# Altium PCB UEEE_READ_FRID_V1.1.PcbDoc
Units mm, origin at the board's own origin, x right, y up, seen from the top; angles counter-clockwise.
Board outline 70 x 88.95 mm, 2 copper layers (Top Layer, Bottom Layer); 71 components, 43 nets, 226 pads, 155 vias.
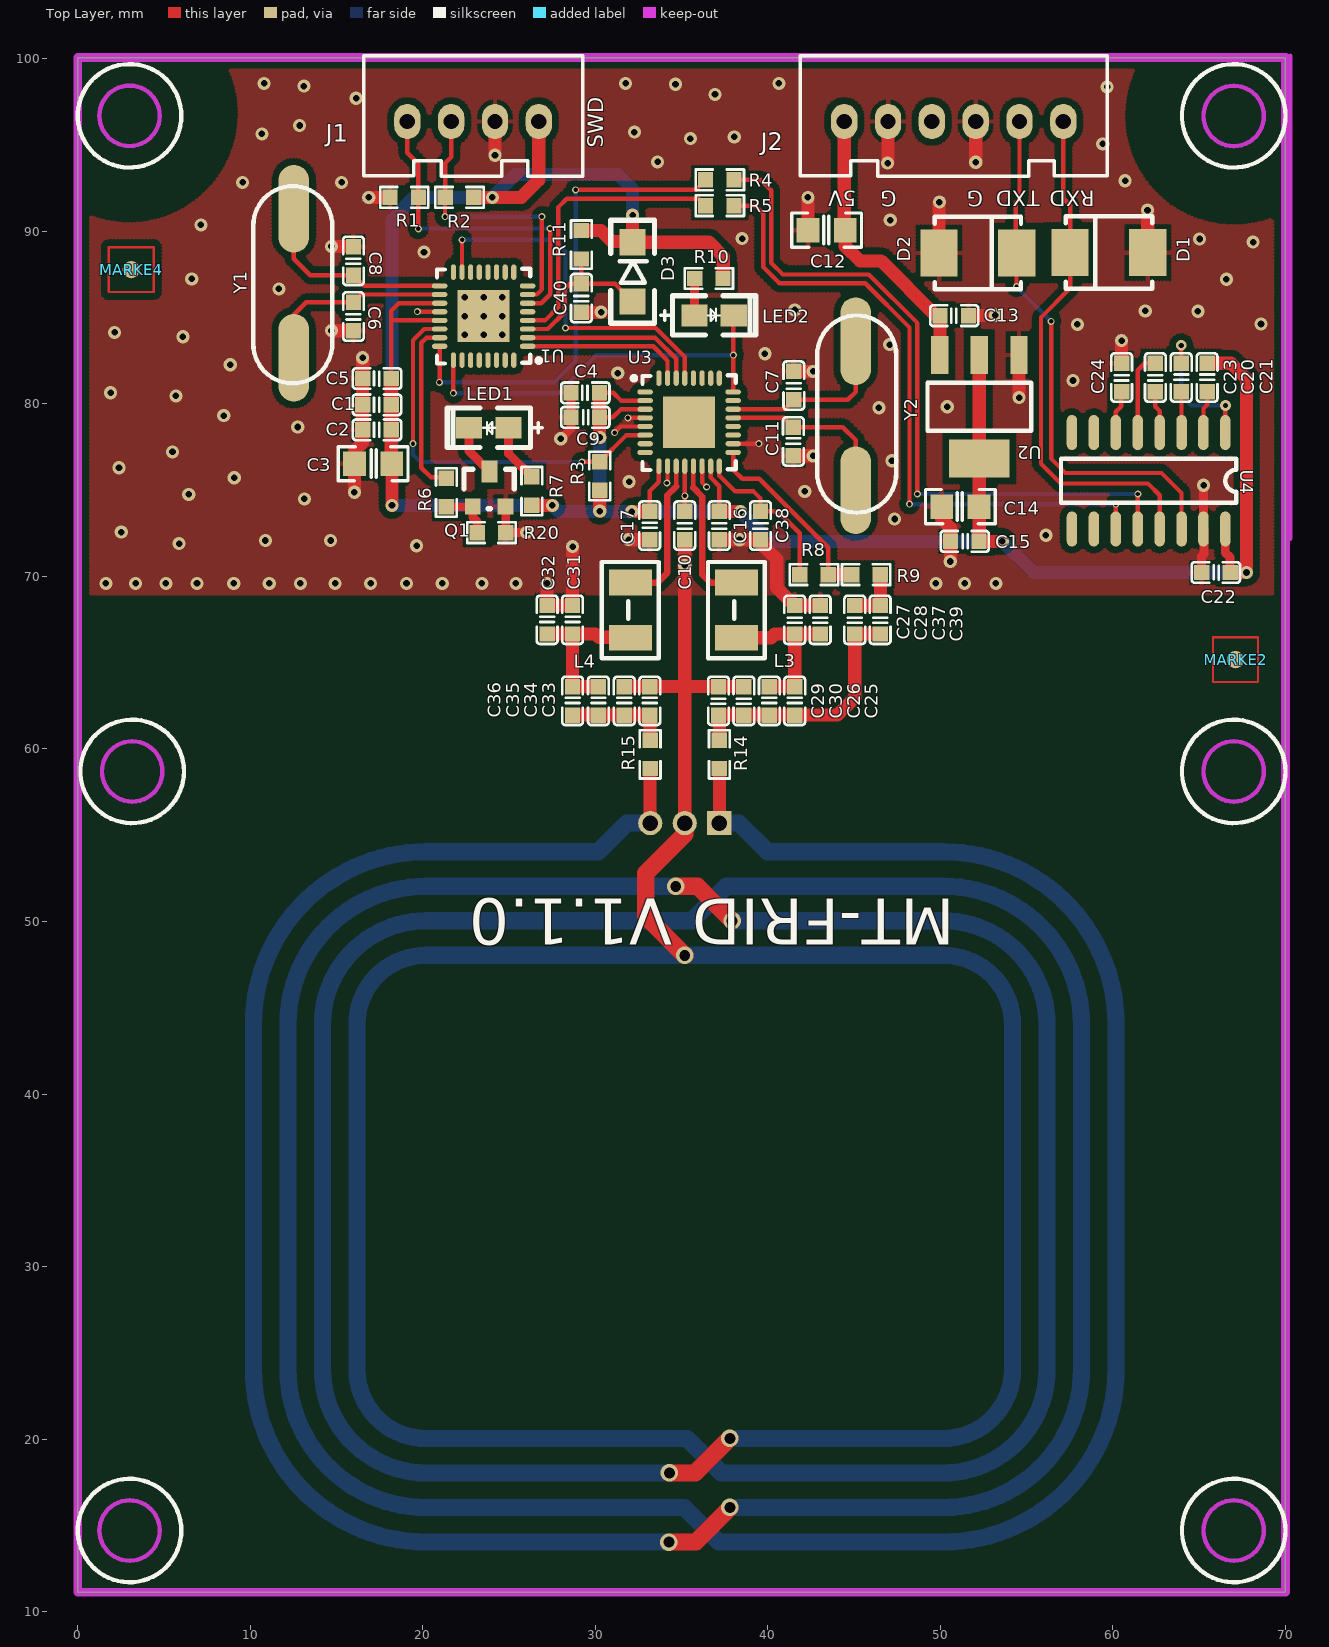
[diagram p0: Top Layer view]
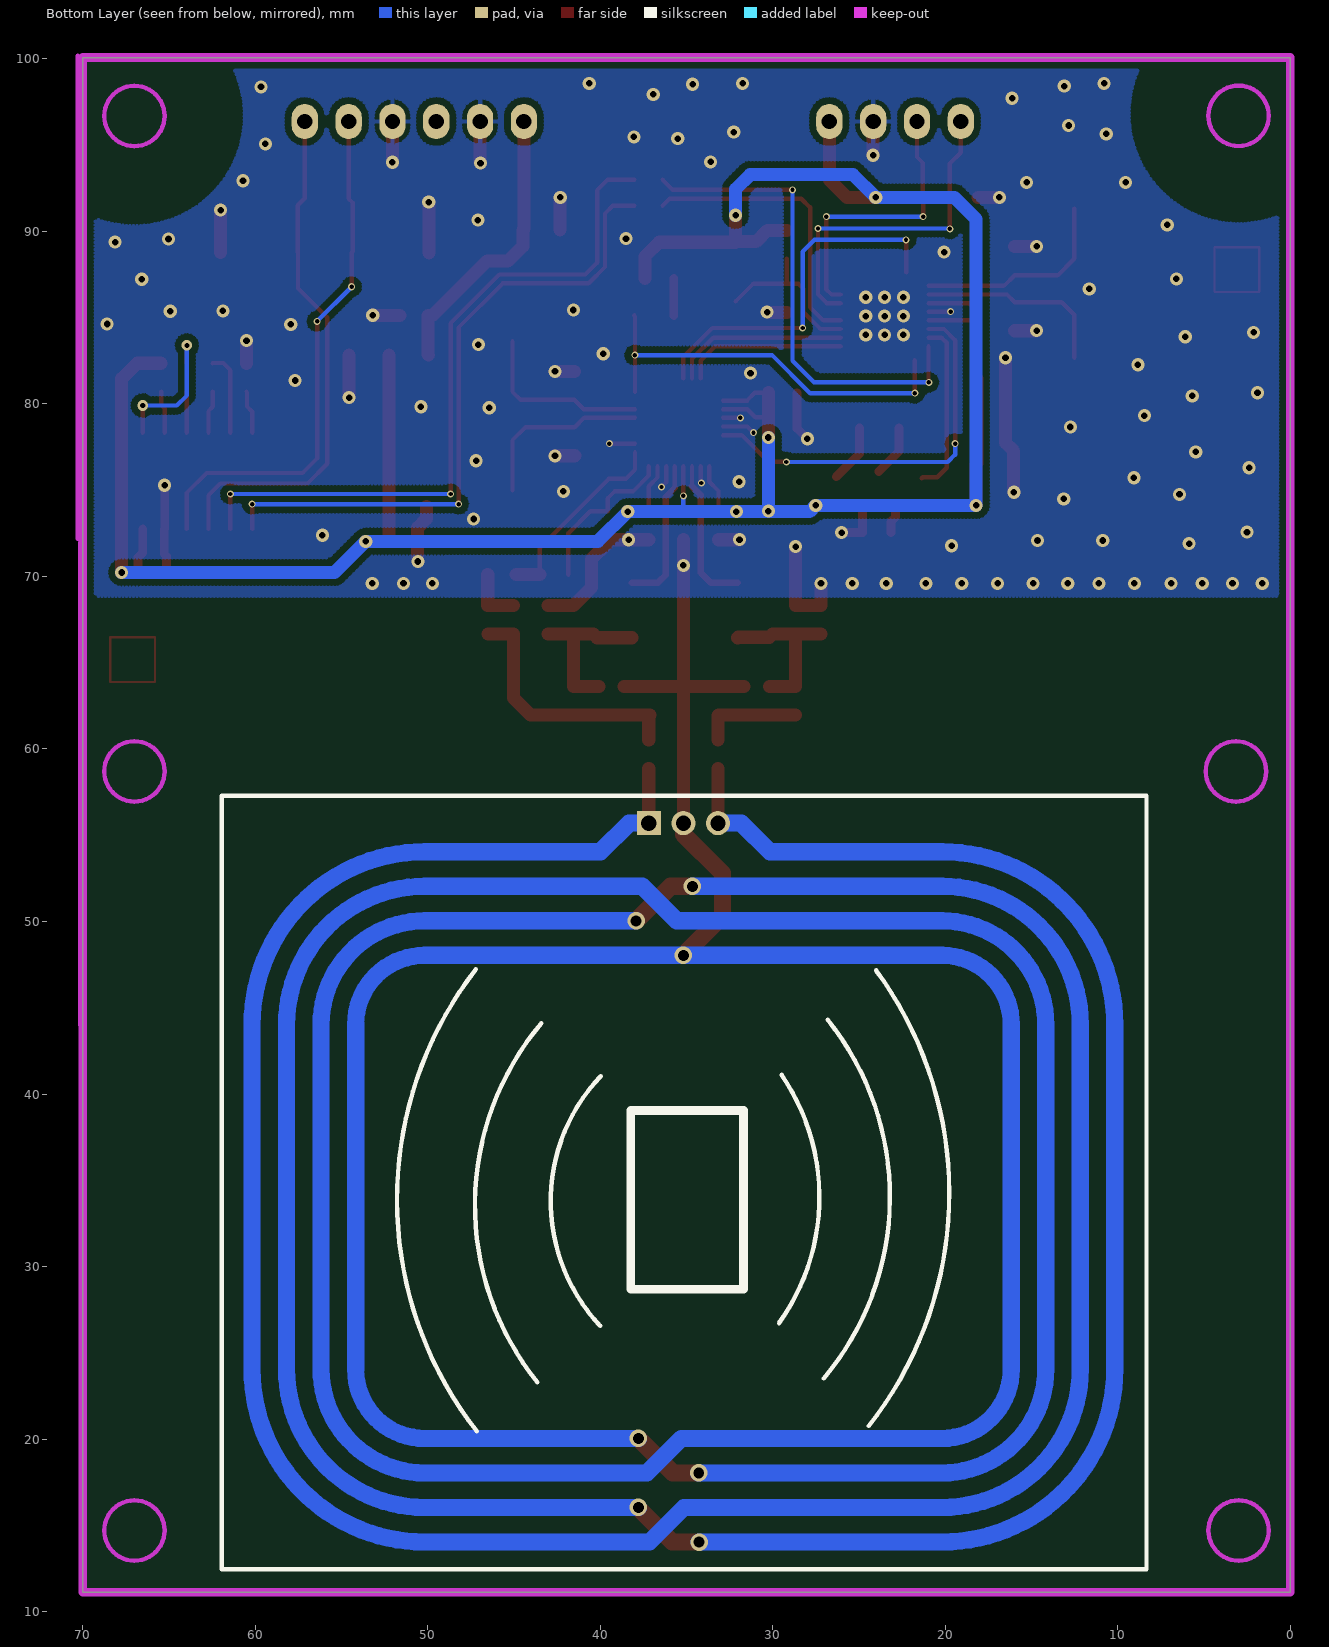
[diagram p1: Bottom Layer view, seen from below]

## Layer stack, top to bottom
Top Layer: signal copper 0.0356
Dielectric: dielectric 0.32, FR-4, Dk 4.8
Bottom Layer: signal copper 0.0356

## Board outline
0,11.125 70,11.125 70,100.076 0,100.076

## Design rules (kind name [scope] priority, off if disabled: settings)
AssemblyTestPointUsage [All] p1 off:
AssemblyTestpoint [All] p1 off: testpointundercomponent=TRUE minsize=1.016 maxsize=2.54 preferedsize=1.524 minholesize=0 maxholesize=1.016 preferedholesize=0.813 testpointgrid=0.025 usegrid=TRUE gridtolerance=0 allowsidetop=TRUE allowsidebottom=TRUE
Clearance Clearance_1 [InPolygon] p1: gap=0.381
Clearance [All] p2: gap=0.127
ComponentClearance [All] p1 off: gap=0.254 collisioncheckmode=3 verticalgap=0.254 showdistances=FALSE
FabricationTestPointUsage [All] p1 off: valid=0 allowmultiple=FALSE
FabricationTestpoint [All] p1 off: side=3 testpointundercomponent=TRUE minsize=1.016 maxsize=2.54 preferedsize=1.524 minholesize=0 maxholesize=1.016 preferedholesize=0.813 testpointgrid=0.025 allowsidetop=TRUE allowsidebottom=TRUE usegrid=TRUE gridtolerance=0
Height [All] p1 off: minheight=0 maxheight=25.4 prefheight=12.7
HoleSize [All] p1 off: absolutevalues=TRUE maxlimit=2.54 minlimit=0.025 maxpercent=80.000 minpercent=20.000
HoleToHoleClearance [All] p1 off: gap=0.025 allowstackedmicrovias=TRUE
LayerPairs [All] p1 off: enforce=TRUE
MinimumSolderMaskSliver [All] p1 off: minsoldermaskwidth=0.025
NetAntennae NetAntennae_2 [InNet('RX1')] p1 off: netantennaetolerance=2539.975
NetAntennae NetAntennae_1 [InNet('Net_3')] p2 off: netantennaetolerance=2539.975
NetAntennae [All] p3 off: netantennaetolerance=0
PolygonConnect PolygonConnect_1 [IsVia] p1: connectstyle=Direct reliefconductorwidth=0.254 reliefentries=4 polygonreliefangle="90 Angle" airgapwidth=0.254
PolygonConnect [All] p2: connectstyle=Relief reliefconductorwidth=0.254 reliefentries=4 polygonreliefangle="90 Angle" airgapwidth=0.254
RoutingVias [All] p1: holewidth=0.305 width=0.61 viastyle="Through Hole" minholewidth=0.254 minwidth=0.406 maxholewidth=0.711 maxwidth=1.27
SilkToSilkClearance [All] p1 off: silktosilkclearance=0.025
SilkToSolderMaskClearance [IsPad] p1 off: minsilkscreentomaskgap=0.025 clearancetoexposedcopper=TRUE
SolderMaskExpansion [All] p1: expansion=0.102
Width Width_1 [InNet('VCC_3V3')] p1: maxlimit=1.27 minlimit=0.254 preferedwidth=0.508
Width Width_2 [InNet('DGND')] p2: maxlimit=1.27 minlimit=0.254 preferedwidth=0.508
Width [All] p3: maxlimit=1.27 minlimit=0.127 preferedwidth=0.254
15 further rules are at their usual default settings.

## Components (designator, comment, footprint, x,y, rotation, side; value= is the part's Value field where it differs from the comment)
C1 "0.1uF" 0603C 17.345,79.946 r180 top
C2 "0.1uF" 0603C 17.345,78.499 r180 top
C3 "10uF" 0805C 18.183,76.517 r180 top
C4 "0.1uF" 0603C 29.417,80.645 r180 top
C5 "0.1uF" 0603C 17.345,81.47 r180 top
C6 "22pF" 0603C 15.977,85.065 r270 top
C7 "15pF" 0603C 41.504,81.064 r270 top
C8 "22pF" 0603C 15.977,88.29 r270 top
C9 "0.1uF" 0603C 29.417,79.223 r0 top
C10 "0.1uF" 0603C 35.179,72.949 r270 top
C11 "15pF" 0603C 41.478,77.826 r90 top
C12 "10uF" 0805C 42.342,90.094 r0 top
C13 "10nF" 0603C 50.8,85.115 r180 top
C14 "4.7uF" 0805C 50.089,74.066 r0 top
C15 "10nF" 0603C 51.41,72.034 r0 top
C16 "0.1uF" 0603C 37.186,72.949 r270 top
C17 "0.1uF" 0603C 33.147,72.949 r90 top
C20 "1uF" 0603C 63.957,81.534 r90 top
C21 "0.1uF" 0603C 65.456,81.534 r90 top
C22 "1uF" 0603C 65.964,70.231 r0 top
C23 "0.1uF" 0603C 62.459,81.534 r270 top
C24 "0.1uF" 0603C 60.503,81.534 r270 top
C25 "X" 0603C 41.554,62.789 r90 top
C26 "20pF" 0603C 40.081,62.789 r90 top
C27 "82pF" 0603C 41.554,67.488 r270 top
C28 "X" 0603C 43.028,67.488 r270 top
C29 "47pF" 0603C 37.135,62.789 r270 top
C30 "10pF" 0603C 38.608,62.789 r270 top
C31 "82pF" 0603C 28.677,67.488 r90 top
C32 "X" 0603C 27.203,67.488 r90 top
C33 "47pF" 0603C 33.152,62.789 r90 top
C34 "10pF" 0603C 31.674,62.789 r90 top
C35 "20pF" 0603C 30.175,62.789 r90 top
C36 "X" 0603C 28.677,62.789 r90 top
C37 "27pF" 0603C 45.034,67.488 r270 top
C38 "0.1uF" 0603C 39.573,72.949 r270 top
C39 "X" 0603C 46.507,67.488 r270 top
C40 "1uF" 0603C 29.185,86.131 r270 top
D1 "SMBJ15CA" SMB（DO-214AA） 59.766,88.773 r0 top
D2 "SMBJ15CA" SMB（DO-214AA） 52.172,88.748 r180 top
D3 "1N4148" 1206D 32.156,87.655 r90 top
J1 "DIP-4_2.54MM" CON-DIP4-2.54mm 22.911,96.368 r0 top
J2 "DIP-6_2.54MM" CON06_2.54 44.425,96.368 r0 top
L3 "560nH/1uH" "3225 [1210 inch]" 38.176,68.047 r270 top
L4 "560nH/1uH" "3225 [1210 inch]" 32.029,68.047 r270 top
LED1 "GREEN" D0805 24.968,78.613 r270 top
LED2 "GREEN" D0805 35.738,85.141 r90 top
MARKE2 "MARK1.0" MARK1.0 67.107,65.176 r90 top
MARKE4 "MARK1.0" MARK1.0 3.099,87.782 r90 top
Q1 "8050" SOT23 22.902,74.04 r0 top
R1 "10K" 0603R 18.923,91.973 r180 top
R2 "10K" 0603R 22.123,91.973 r180 top
R3 "10K" 0603R 30.251,75.819 r270 top
R4 "0R" 0603R 37.211,92.989 r0 top
R5 "0R" 0603R 37.211,91.491 r0 top
R6 "10K" 0603R 21.364,74.871 r270 top
R7 "1.5K" 0603R 26.317,74.947 r270 top
R8 "1K" 0603R 42.672,70.104 r0 top
R9 "1.5K" 0603R 45.695,70.104 r0 top
R10 "1.5K" 0603R 36.576,87.274 r180 top
R11 "1.5K" 0603R 29.185,89.23 r90 top
R14 "1R" 0603R 37.186,59.69 r270 top
R15 "1R" 0603R 33.172,59.69 r270 top
R20 "3K" 0603R 23.978,72.542 r180 top
U1 "LPC824M201JHI33" HVQFN-32 23.52,85.09 r90 top
U2 "SPX1117M3-L-3.3V" SOT-223 52.253,79.835 r90 top
U3 "FM17520" QFN-32 35.433,78.943 r0 top
U4 "SP3232" SO-16 66.523,78.334 r270 top
Y1 "12MHZ" ZS_SMD 12.522,91.313 r270 top
Y2 "27.12MHZ" ZS_SMD 45.085,75.006 r90 top
? "13.56MHZ天线" 天线40X50MM 35.179,55.702 r0 bottom

## Footprints (in the part's own frame and the unit in brackets; to place one, negate y for a bottom-side part, rotate by r counter-clockwise, add the part's x,y. Pads: shape width x height; smd on the part's side, far side on the other; paste and mask are expansions set on the pad)
0603C [mil]
  rect 35x35 smd: 1(-32.5,0) 2(32.5,0)
  silkscreen extent -55,-24 55,24
0603R [mil]
  rect 35x35 smd: 1(-32.5,0) 2(32.5,0)
  silkscreen extent -55,-24 55,24
0805C [mil]
  rect 52x56 smd: 1(-0.58,-0.68) 2(84.42,-0.68)
  silkscreen extent -38,-40 121,38
1206D [mil]
  rect 60x60 smd: 1(-67.5,0) 2(67.5,0)
  silkscreen extent -118,-50 117,50
"3225 [1210 inch]" [mm] "3225 [1210 inch]"
  rect 1.5x2.5 smd: 1(-1.6,0) 2(1.6,0)
  silkscreen extent -2.79,-1.65 2.79,1.65
CON06_2.54 [mil]
  oval 60x80 hole 35: 1(0,0) 2(100,0) 3(200,0) 4(300,0) 5(400,0) 6(500,0)
  silkscreen extent -100,-125 600,150
CON-DIP4-2.54mm [mil]
  oval 60x80 hole 35: 1(-150,0) 2(-50,0) 3(50,0) 4(150,0)
  silkscreen extent -250,-125 250,150
D0805 [mil]
  rect 50x60 smd: 1(-0.34,-0.09) 2(-0.34,-90.09)
  silkscreen extent -45,-140 45,77
HVQFN-32 [mm] "HVQFN-32"
  oval 0.3x0.9 smd mask+0.051: 1(-1.75,-2.55) 2(-1.25,-2.55) 3(-0.75,-2.55) 4(-0.25,-2.55) 5(0.25,-2.55) 6(0.75,-2.55) 7(1.25,-2.55) 8(1.75,-2.55) 17(1.75,2.55) 18(1.25,2.55) 19(0.75,2.55) 20(0.25,2.55) 21(-0.25,2.55) 22(-0.75,2.55) 23(-1.25,2.55) 24(-1.75,2.55)
  oval 0.9x0.3 smd mask+0.051: 9(2.55,-1.75) 10(2.55,-1.25) 11(2.55,-0.75) 12(2.55,-0.25) 13(2.55,0.25) 14(2.55,0.75) 15(2.55,1.25) 16(2.55,1.75) 25(-2.55,1.75) 26(-2.55,1.25) 27(-2.55,0.75) 28(-2.55,0.25) 29(-2.55,-0.25) 30(-2.55,-0.75) 31(-2.55,-1.25) 32(-2.55,-1.75)
  rect 3x3 smd mask+0.051: 33(0,0)
  silkscreen extent -2.75,-3.32 2.75,2.7
MARK1.0 [mm]
  round 1 smd mask+0.5: 1(0,0)
  Top Layer lines w0.127: -1.3,1.3 1.3,1.3 1.3,-1.3 -1.3,-1.3 -1.3,1.3
QFN-32 [mm] "QFN-32"
  oval 0.9x0.3 smd: 1(-2.55,1.751) 2(-2.55,1.25) 3(-2.55,0.75) 4(-2.55,0.25) 5(-2.55,-0.25) 6(-2.55,-0.75) 7(-2.55,-1.25) 8(-2.55,-1.75) 17(2.55,-1.75) 18(2.55,-1.25) 19(2.55,-0.75) 20(2.55,-0.25) 21(2.55,0.25) 22(2.55,0.75) 23(2.55,1.25) 24(2.55,1.75)
  oval 0.3x0.9 smd: 9(-1.75,-2.55) 10(-1.25,-2.55) 11(-0.75,-2.55) 12(-0.25,-2.55) 13(0.25,-2.55) 14(0.75,-2.55) 15(1.25,-2.55) 16(1.75,-2.55) 25(1.75,2.55) 26(1.25,2.55) 27(0.75,2.55) 28(0.25,2.55) 29(-0.25,2.55) 30(-0.75,2.55) 31(-1.25,2.55) 32(-1.75,2.55)
  rect 3x3 smd: 33(0,0)
  silkscreen extent -3.32,-2.78 2.7,2.72
SMB（DO-214AA） [mm] "SMB（DO-214AA）"
  rect 2.159x2.743 smd: 1(2.25,0) 2(-2.25,0)
  silkscreen extent -2.5,-2.1 2.5,2.1
SO-16 [mil]
  oval 80x24 smd: 1(-0.2,-0.3) 2(-0.2,-50.3) 3(-0.2,-100.3) 4(-0.2,-150.3) 5(-0.2,-200.3) 6(-0.2,-250.3) 7(-0.2,-300.3) 8(-0.2,-350.3) 9(219.8,-350.3) 10(219.8,-300.3) 11(219.8,-250.3) 12(219.8,-200.3) 13(219.8,-150.3) 14(219.8,-100.3) 15(219.8,-50.3) 16(219.8,-0.3)
  silkscreen extent 60,-375 160,25
SOT23 [mil]
  rect 36x36 smd: 1(-0.49,0.35) 3(74.51,0.35)
  rect 36x50 smd: 2(37.51,80.35)
  silkscreen extent -20,-5 95,85
SOT-223 [mm]
  rect 2.2x1 smd: 1(3,-2.3) 2(3,0) 3(3,2.3)
  rect 2.2x3.5 smd: 2(-3,0)
  silkscreen extent -1.4,-3 1.4,3
ZS_SMD [mil]
  oval 200x70 smd: 1(0,0) 2(340,0)
  silkscreen extent -52,-93 399,88
天线40X50MM [mil] "天线40X50MM"
  rect 55x55 hole 35: 1(78.74,0)
  round 55 hole 35: 2(0,0) 3(-78.74,0)
  Top Layer lines w39.37: -593.44,1561.56 -1.26,1561.56 77.48,1640.3 590.54,1640.3 cw(c590.55,1246.61) 984.25,1246.61 984.25,459.21 cw(c590.55,459.21) 590.55,65.51 189.5,65.5 124,0 78.74,0 ; -590.55,1640.32 ccw(c-590.55,1246.61) -984.25,1246.61 -984.25,459.21 ccw(c-590.55,459.21) -590.55,65.51 -197.5,65.5 -132,0 -78.74,0 ; -590.55,1561.57 ccw(c-590.55,1246.61) -905.51,1246.61 -905.51,459.21 ccw(c-590.55,459.21) -590.55,144.25 -20.5,144.24 ; -590.55,1482.83 ccw(c-590.55,1246.61) -826.77,1246.61 -826.77,459.21 ccw(c-590.55,459.21) -590.55,222.99 15.51,222.98 ; -590.54,1482.82 -35,1482.82 ; -590.55,301.73 cw(c-590.55,459.21) -748.03,459.21 -748.03,1246.61 cw(c-590.55,1246.61) -590.55,1404.09 4.49,1404.08 83.23,1482.82 590.54,1482.82 ; -590.37,1640.5 -36,1640.5 ; -586.12,301.72 0,301.72 590.54,301.72 ; 94.25,144.24 590.54,144.24 ccw(c590.55,459.21) 905.51,459.21 905.51,1246.61 ccw(c590.55,1246.61) 590.55,1561.57 103.01,1561.57 ; 103,1404.08 590.54,1404.08 cw(c590.55,1246.61) 748.03,1246.61 748.03,459.21 cw(c590.55,459.21) 590.55,301.73 ; 108,222.98 590.54,222.98 ccw(c590.55,459.21) 826.77,459.21 826.77,1246.61 ccw(c590.55,1246.61) 590.55,1482.83
  Top Layer lines w40: 15.51,222.98 94.25,144.24
  Bottom Layer lines w39.37: -36,1640.5 25.5,1640.5 103,1563 ; -35,1482.82 24.26,1482.82 103,1404.08 ; -20.5,144.24 26.74,144.24 29.26,144.24 108,222.98 ; 0,301.72 -89,212.72 -89,114.5 0,25.5 0,0
  silkscreen extent -1057,-62 1053,1703

## Part data
C1 C2 C3 C4 C5 C6 C8 C10 C16: library part CAP_3, "Capacitor"
C7 C9 C11 C12 C13 C14 C15 C17 C20 C21 C22 C23 C24 C25 C26 C27 C28 C29 C30 C31 C32 C33 C34 C35 C36 C37 C38 C39 C40: library part CAP, "Capacitor"
D1 D2: library part TVS-D
D3: library part DIODE, "贴片二极管/1N4148/LL34/长电"
J1: library part "4 HEADER", "4 Pin Header"
J2: library part CON6, "Connector"
L3 L4: library part INDUCTOR, "NLV32T-R56J-PF/NLV32T-1R0J-PF"
LED1 LED2: library part LED
MARKE2 MARKE4: library part CON1, "Connector"
Q1: library part NPN
R1 R2 R14 R15: library part RES2
R3 R6 R7 R8 R9 R10 R11 R20: library part RES1
R4 R5: library part RES-1, "RES"
U2: library part LM1117MPX-3.3
U4: library part MAX232ESE
Y1 Y2: library part CRYSTAL

## Via types
v1: diameter 0.762, hole 0.381, Top Layer to Bottom Layer, 121 vias
v2: diameter 0.406, hole 0.254, Top Layer to Bottom Layer, 25 vias
v3: diameter 1.016, hole 0.635, Top Layer to Bottom Layer, 7 vias
v4: diameter 0.61, hole 0.305, Top Layer to Bottom Layer, 2 vias

## Nets (pads, with @x,y where several pads share a name; then routed paths per layer and width w, separated by ;. In a path a pad name is that pad's centre, name@x,y a point inside that pad or via, vN(x,y) a via of type N, cw(c..) or ccw(c..) an arc to the next point about the centre after c; other vN are vias at no path point)
COM_RXD: R4.1 U1.24 | length 28.2
  Top Layer w0.254: v2(20.955,81.255) 20.97,81.27 U1.24 ; v2(28.854,92.405) 35.801,92.405 R4.1
  Bottom Layer w0.254: v2(20.955,81.255) 27.61,81.255 28.854,82.499 v2(28.854,92.405)
COM_TXD: R5.1 U1.4 | length 16.8
  Top Layer w0.254: U1.4 27.08,84.84 27.838,85.598 27.838,91.389 28.346,91.897 35.979,91.897 R5.1
DGND: ?.2 C1.2 C2.2 C3.2 C4.2 C5.2 C6.2 C7.1 C8.1 C9.1 C10.2 C11.1 C12.1 C13.1 C14.1 C15.1 C16.2 C17.1 C22.1 C24.1 C27.1 C28.1 C29.1 C30.1 C31.2 C32.2 C33.2 C34.2 C38.2 C40.2 D1.1 D2.1 J1.3 J2.2 J2.4 Q1.3 R1.2 R20.1 U1.20 U1.33 U2.1 U3.4 U3.5 U3.10 U3.14 U3.18 U4.15 | length 96.1
  Top Layer w0.254: v2(19.685,85.344) 19.689,85.34 U1.20 ; v2(31.115,78.334) 31.475,78.693 U3.5 ; v2(31.877,79.197) 31.881,79.193 U3.4 ; v2(34.14,75.415) 34.183,75.457 U3.10 ; U3.14 36.183,75.45 v2(36.449,75.184) ; U3.18 39.466,77.693 v2(39.472,77.699)
  Top Layer w0.508: Q1.3 24.803,74.041 R20.1 v1(26.01,72.542) ; v1(27.991,77.978) 28.591,78.578 C9.1 C4.2 ; C22.1 65.138,71.158 65.278,71.298 65.278,72.718 U4.15 65.245,75.278 v1(65.253,75.286)
  Top Layer w0.762: v1(14.707,84.252) 14.719,84.239 C6.2 ; v1(14.707,89.129) 14.719,89.116 C8.1 ; v1(16.027,74.879) 16.039,74.891 C3.2 16.039,77.278 16.51,77.749 16.51,81.461 C5.2 16.519,82.668 v1(16.51,82.677) ; v1(16.866,91.973) R1.2 ; v1(24.181,94.412) J1.3 ; v1(27.203,69.596) C32.2 C31.2 v1(28.677,71.73) ; C40.2 30.315,85.306 v1(30.328,85.319) ; C34.2 C33.2 35.103,63.614 ; v1(31.928,72.136) 31.941,72.123 C17.1 ; ?.2 35.179,63.538 35.103,63.614 ; C10.2 v1(35.179,70.637) 35.179,63.691 35.103,63.614 ; C16.2 C38.2 39.573,71.933 40.513,70.993 40.513,69.355 C27.1 C28.1 ; C30.1 C29.1 35.103,63.614 ; C11.1 42.609,77 v1(42.621,76.987) ; C7.1 v1(42.621,81.89) ; v1(42.316,91.973) 42.327,91.963 C12.1 ; v1(46.939,93.955) 46.965,93.98 J2.2 ; D2.1 49.922,91.679 v1(49.936,91.694) ; C14.1 50.074,73.344 50.584,72.834 C15.1 50.584,70.879 v1(50.571,70.866) ; C13.1 53.162,85.115 v1(53.188,85.141) ; v1(52.045,94.005) J2.4 ; U2.1 54.553,80.372 v1(54.559,80.366) ; C24.1 v1(60.503,83.668) ; v1(62.001,91.237) 62.016,91.222 D1.1
  other v1: 1.626,69.596 3.353,69.596 5.105,69.596 6.909,69.596 9.042,69.596 11.1,69.596 12.903,69.596 14.91,69.596 16.967,69.596 19.05,69.596 21.128,69.596 23.419,69.596 25.395,69.596 49.733,69.596 51.404,69.596 53.213,69.596 19.634,71.78 5.867,71.907 10.871,72.083 14.656,72.083 38.354,72.123 56.109,72.39 2.515,72.568 47.34,73.33 13.132,74.498 6.426,74.752 42.139,74.927 31.953,75.489 9.068,75.717 2.388,76.302 47.193,76.708 5.486,77.216 12.751,78.664 8.458,79.324 46.431,79.781 50.394,79.832 5.684,80.467 1.905,80.645 57.683,81.356 31.293,81.788 8.839,82.271 39.822,82.906 47.066,83.439 6.091,83.896 22.428,83.998 23.52,83.998 24.613,83.998 2.134,84.15 57.937,84.607 68.58,84.633 22.428,85.09 23.52,85.09 24.613,85.09 64.922,85.369 61.874,85.395 41.554,85.446 22.428,86.182 23.52,86.182 24.613,86.182 11.659,86.665 66.573,87.224 6.604,87.249 20.066,88.798 68.123,89.383 65.024,89.558 38.506,89.586 7.137,90.373 47.092,90.653 9.55,92.837 15.291,92.837 60.706,92.939 33.604,94.028 59.411,95.072 35.509,95.377 38.049,95.479 10.668,95.654 32.258,95.758 12.852,96.139 16.129,97.714 36.932,97.942 59.665,98.374 13.106,98.425 34.646,98.527 10.795,98.577 31.75,98.577 40.64,98.577
FR_RST: R3.1 U1.22 U3.6 | length 22.7
  Top Layer w0.254: v2(19.431,77.699) 19.431,83.693 20.078,84.34 U1.22 ; v2(29.21,76.632) 29.223,76.644 R3.1 31.8,78.193 U3.6
  Bottom Layer w0.254: v2(19.431,77.699) 19.431,77.064 19.863,76.632 v2(29.21,76.632)
Net_1: ?.1 R14.2 | length 3.2
  Top Layer w0.762: ?.1 37.186,55.709 R14.2
  other v3: 34.265,14.034 37.795,16.038 34.29,18.039 37.795,20.039 35.179,48.038 37.922,50.038 34.658,52.038
Net_3: ?.3 R15.2 | length 3.2
  Top Layer w0.762: R15.2 33.172,55.709 ?.3
NetC6_1: C6.1 U1.18 Y1.2 | length 11.4
  Top Layer w0.254: Y1.2 12.522,85.166 13.246,85.89 C6.1 16.427,86.34 U1.18
NetC7_2: C7.2 U3.22 Y2.2 | length 10.5
  Top Layer w0.254: U3.22 40.958,79.693 C7.2 44.628,80.239 45.085,80.696 Y2.2
NetC8_2: C8.2 U1.17 Y1.1 | length 12
  Top Layer w0.254: Y1.1 12.522,88.417 13.475,87.465 C8.2 16.601,86.84 U1.17
NetC11_2: C11.2 U3.21 Y2.1 | length 10.5
  Top Layer w0.254: U3.21 40.936,79.193 C11.2 44.336,78.651 45.085,77.902 Y2.1
NetC20_1: C20.1 U4.3 | length 2.4
  Top Layer w0.254: C20.1 63.975,80.691 U4.3
NetC20_2: C20.2 U4.1 | length 8.3
  Top Layer w0.254: C20.2 v4(63.957,83.388) ; U4.1 66.515,79.901 v4(66.523,79.908)
  Bottom Layer w0.254: v4(63.957,83.388) 63.957,80.493 64.541,79.908 v4(66.523,79.908)
NetC21_1: C21.1 U4.2 | length 2.5
  Top Layer w0.254: U4.2 65.245,79.748 65.456,79.959 C21.1
NetC23_1: C23.1 U4.5 | length 4.8
  Top Layer w0.254: U4.5 61.435,81.958 61.849,82.372 62.446,82.372 C23.1
NetC23_2: C23.2 U4.4 | length 2.5
  Top Layer w0.254: C23.2 62.459,79.832 62.705,79.586 U4.4
NetC24_2: C24.2 U4.6 | length 2.5
  Top Layer w0.254: U4.6 60.165,79.545 60.477,79.858 60.477,80.683 C24.2
NetC25_2: C25.2 C26.2 C27.2 C28.2 L3.2 | length 9.5
  Top Layer w0.762: L3.2 40.183,66.447 40.399,66.662 C27.2 ; C26.2 C25.2 C27.2 ; C28.2 C27.2
NetC31_1: C31.1 C32.1 C35.2 C36.2 L4.2 | length 9.5
  Top Layer w0.762: C32.1 C31.1 ; C35.2 C36.2 C31.1 ; L4.2 32.004,66.472 30.201,66.472 30.01,66.662 C31.1
NetC33_1: C33.1 C34.1 C35.1 C36.1 R15.1 | length 5.9
  Top Layer w0.762: C36.1 C35.1 C34.1 C33.1 33.172,61.943 R15.1
NetC37_1: C37.1 C39.1 R9.2 | length 3.3
  Top Layer w0.762: C37.1 C39.1 46.52,68.326 R9.2
NetJ1_1: J1.1 R1.1 U1.6 | length 19.5
  Top Layer w0.254: J1.1 19.101,94.564 19.736,93.929 v2(19.736,90.145) ; U1.6 26.861,85.84 27.381,86.36 v2(27.381,90.17)
  Bottom Layer w0.254: v2(19.736,90.145) 19.761,90.17 v2(27.381,90.17)
NetJ1_2: J1.2 R2.2 U1.7 | length 16.4
  Top Layer w0.254: v2(21.285,90.856) 21.285,91.961 R2.2 21.298,93.967 21.641,94.31 J1.2 ; U1.7 26.599,86.34 26.899,86.639 v2(26.899,90.856)
  Bottom Layer w0.254: v2(21.285,90.856) v2(26.899,90.856)
NetLED1_1: LED1.1 R7.1 | length 3.4
  Top Layer w0.508: LED1.1 24.966,77.123 R7.1
NetLED1_2: LED1.2 Q1.2 | length 3
  Top Layer w0.508: LED1.2 22.68,77.256 Q1.2
NetLED2_1: LED2.1 R10.2 | length 2.1
  Top Layer w0.254: R10.2@35.74,87.264 R10.2
  Top Layer w0.508: LED2.1 R10.2@35.74,87.264
NetQ1_1: Q1.1 R6.2 R20.2 | length 3.1
  Top Layer w0.508: R6.2 22.886,74.045 Q1.1 22.89,73.427 23.152,73.165 R20.2
NetR4_2: R4.2 U4.12 | length 41.2
  Top Layer w0.254: R4.2 39.573,92.989 40.183,92.38 40.183,88.189 40.869,87.503 45.847,87.503 48.666,84.684 v2(48.666,74.778) ; U4.12 61.435,74.77 v2(61.443,74.778)
  Bottom Layer w0.254: v2(48.666,74.778) v2(61.443,74.778)
NetR5_2: R5.2 U4.11 | length 38.6
  Top Layer w0.254: R5.2 39.268,91.491 39.726,91.034 39.726,87.935 40.665,86.995 45.644,86.995 48.209,84.43 v2(48.209,74.193) ; U4.11 60.165,74.186 v2(60.173,74.193)
  Bottom Layer w0.254: v2(48.209,74.193) v2(60.173,74.193)
RESET: C40.1 D3.1 R11.1 U1.3 | length 9.8
  Top Layer w0.254: U1.3 27.241,84.34 28.219,85.319 28.219,86.665 28.511,86.957 C40.1 ; R11.1 C40.1 ; D3.1 31.14,86.957 C40.1
RUN: R6.1 U1.23 | length 10.1
  Top Layer w0.254: U1.23 20.213,83.84 19.914,83.541 19.914,76.302 20.472,75.743 21.317,75.743 R6.1
RX: R8.2 R9.1 U3.17 | length 11.3
  Top Layer w0.254: U3.17 37.983,76.19 38.506,75.667 39.497,75.667 43.498,71.666 R8.2
  Top Layer w0.762: R8.2 R9.1
RX1: C25.1 C26.1 C29.2 C30.2 C37.2 C39.2 R14.1 | length 15
  Top Layer w0.762: R14.1 37.186,61.912 C29.2 C30.2 C26.1 C25.1 44.031,61.963 45.034,62.967 C37.2 C39.2
RXD: D1.2 J2.6 U4.13 | length 30.3
  Top Layer w0.254: J2.6 57.125,91.923 57.531,91.516 57.531,88.788 D1.2 57.516,86.701 55.829,85.014 55.829,76.53 56.972,75.387 62.027,75.387 62.705,74.709 U4.13
SPI_CLK: U1.15 U3.29 | length 21.4
  Top Layer w0.254: U1.15 22.27,89.504 v2(22.276,89.51) ; v2(28.27,84.404) 33.503,84.404 35.183,82.724 U3.29
  Bottom Layer w0.254: v2(22.276,89.51) 27.584,89.51 28.27,88.824 v2(28.27,84.404)
SPI_CS: LED2.2 U1.25 U3.24 | length 23.5
  Top Layer w0.254: v2(21.768,80.62) 21.77,80.622 U1.25 ; U3.24 37.983,85.089 LED2.2
  Bottom Layer w0.254: v2(21.768,80.62) 27.838,80.62 30.048,82.829 v2(37.998,82.829)
SPI_MISO: U1.1 U3.31 | length 9.5
  Top Layer w0.254: U1.1 33.348,83.34 34.183,82.505 U3.31
SPI_MOSI: U1.2 U3.30 | length 10.2
  Top Layer w0.254: U1.2 33.457,83.84 34.683,82.614 U3.30
TX1: L4.1 U3.11 | length 8.8
  Top Layer w0.254: 34.683,75.221 U3.11
  Top Layer w0.381: L4.1 33.604,69.647 34.163,70.206 34.163,74.701 34.683,75.221
TX2: L3.1 U3.13 | length 8.7
  Top Layer w0.254: 35.683,75.137 U3.13
  Top Layer w0.381: 35.683,75.137 36.195,74.625 36.195,70.104 36.652,69.647 L3.1
TXD: D2.2 J2.5 U4.14 | length 31
  Top Layer w0.254: v2(54.407,86.792) 54.407,88.762 54.356,88.813 54.356,91.669 54.585,91.897 J2.5 ; v2(56.413,84.785) 56.413,76.835 57.252,75.997 62.814,75.997 63.975,74.836 U4.14
  Bottom Layer w0.254: v2(54.407,86.792) v2(56.413,84.785)
VCC_3V3: C1.1 C2.1 C3.1 C4.1 C5.1 C9.2 C10.1 C14.2 C15.2 C16.1 C17.2 C21.2 C22.2 D3.2 J1.4 R2.1 R3.2 R7.2 R10.1 R11.2 U1.19 U1.21 U2.2 U3.2 U3.3 U3.9 U3.12 U3.15 U4.16 | length 177.1
  Top Layer w0.254: C5.1 18.17,84.836 ; U1.21 18.174,84.84 18.17,84.836 ; U1.19 18.606,85.84 18.17,85.404 18.17,84.836 ; C9.2 31.013,79.223 31.484,79.693 U3.3 ; C4.1 31.039,80.645 31.49,80.194 U3.2 ; C4.1@30.267,80.416 C4.1@30.293,80.391 ; C17.2 33.147,74.955 33.683,75.491 U3.9 ; C10.1 35.183,73.778 v2(35.183,74.676) U3.12 ; U3.15 36.683,75.737 37.186,75.235 C16.1
  Top Layer w0.508: U4.16 66.515,71.382 66.789,71.107 C22.2
  Top Layer w0.762: C5.1 C1.1 C2.1 18.17,76.562 C3.1 18.212,76.521 v1(18.212,74.117) ; R2.1 v1(24.028,91.973) 25.705,91.973 26.721,92.989 J1.4 ; R7.2 26.321,74.117 v1(27.508,74.117) ; R11.2 30.315,90.056 30.963,89.408 32.118,89.408 D3.2 ; C4.1 C9.2 30.242,78.064 v1(30.251,78.054) ; R3.2 v1(30.251,73.787) v1@30.264,73.774 ; v1(32.106,73.762) 32.118,73.774 C17.2 ; v1(32.156,90.932) D3.2 ; C16.1 37.198,73.762 v1(38.405,73.762) ; R10.1 37.414,87.287 37.414,88.544 36.589,89.37 D3.2 ; U2.2@52.253,82.835 52.253,72.052 C15.2 v1(53.594,72.034) ; C21.2 66.84,82.359 67.742,81.458 v1(67.742,70.231) C22.2
  Bottom Layer w0.254: 35.179,73.762 35.183,73.766 v2(35.183,74.676)
  Bottom Layer w0.762: v1(30.251,73.787) v1(30.251,78.054) ; v1(32.156,90.932) 32.156,92.456 31.318,93.294 25.349,93.294 v1(24.028,91.973) 19.482,91.973 18.212,90.703 v1(18.212,74.117) v1(27.508,74.117) 27.864,73.762 v1(32.106,73.762) 35.179,73.762 v1(38.405,73.762) 40.132,72.034 v1(53.594,72.034) 55.397,70.231 v1(67.742,70.231)
VCC_5V: C12.2 C13.2 J2.1 U2.3 | length 16.7
  Top Layer w0.762: J2.1 44.425,90.138 C12.2 44.486,89.143 45.339,88.29 46.558,88.29 49.733,85.115 C13.2 49.975,82.856 U2.3
VMID: C38.1 R8.1 U3.16 | length 9.4
  Top Layer w0.254: U3.16 37.183,75.847 38.1,74.93 39.167,74.93 39.573,74.524 C38.1 40.577,73.774 41.847,72.504 R8.1
pads on no net: J2.3 MARKE2.1 MARKE4.1 U1.5 U1.8 U1.9 U1.10 U1.11 U1.12 U1.13 U1.14 U1.16 U1.26 U1.27 U1.28 U1.29 U1.30 U1.31 U1.32 U3.1 U3.7 U3.8 U3.19 U3.20 U3.23 U3.25 U3.26 U3.27 U3.28 U3.32 U3.33 U4.7 U4.8 U4.9 U4.10

## Polygon pours and split planes (outlines as drawn)
DGND on Top Layer "DGND" (hatched 90Degree grid 0.203 track 0.254, remove dead copper, pour order 2): 0,100.076 70,100.076 70,69.014 70.002,69.012 0,69.012 0,100.076
DGND on Bottom Layer "DGND" (hatched 90Degree grid 0.203 track 0.254, remove dead copper, pour order 4): 70,100.076 70,68.885 0,68.885 0,100.076 70,100.076

## Keep-outs
Keep-Out Layer:
  circle w0.254: c67,58.7 r1.75
  circle w0.254: c3.152,58.7 r1.75
  circle w0.254: c67,96.69 r1.75
  circle w0.254: c3,96.7 r1.75
  circle w0.254: c67,14.7 r1.75
  circle w0.254: c3,14.7 r1.75
  lines w0.254: 69.926,15.967 69.926,43.967 ; 70.129,43.984 70.129,71.984 ; 70.282,72.178 70.282,100.178
  lines w0.508: 0,11.125 70,11.125 70,100.076 0,100.076 0,11.125

## Silkscreen, mask and mechanical layers (free items; w line width, h text height)
Top Overlay:
  circle w0.254: c67,58.7 r3
  circle w0.254: c3.152,58.7 r3
  circle w0.254: c67,14.7 r3
  circle w0.254: c3,14.7 r3
  circle w0.254: c67,96.7 r3
  circle w0.254: c3,96.7 r3
  text "SWD" at 30.759,94.844 h1.52 r90
  text "TXD" at 55.753,92.652 h1.52 r180
  text "RXD" at 58.953,92.652 h1.52 r180
  text "5V" at 45.11,92.634 h1.52 r180
  text "G" at 47.473,92.634 h1.52 r180
  text "G" at 52.476,92.634 h1.52 r180
  text "MT-FRID V1.1.0" at 50.825,52.197 h4.57 r180